# Altium PCB CAN-to-CAN2.PcbDoc
Units mm, origin at the board's own origin, x right, y up, seen from the top; angles counter-clockwise.
Board outline 134.75 x 110.49 mm, 4 copper layers (Top Layer 1, GND, +5V, Bottom Layer 4), stack 0.603 mm thick; 112 components, 87 nets, 365 pads, 18 vias.
Unrouted connection lines stored in the file: 211.
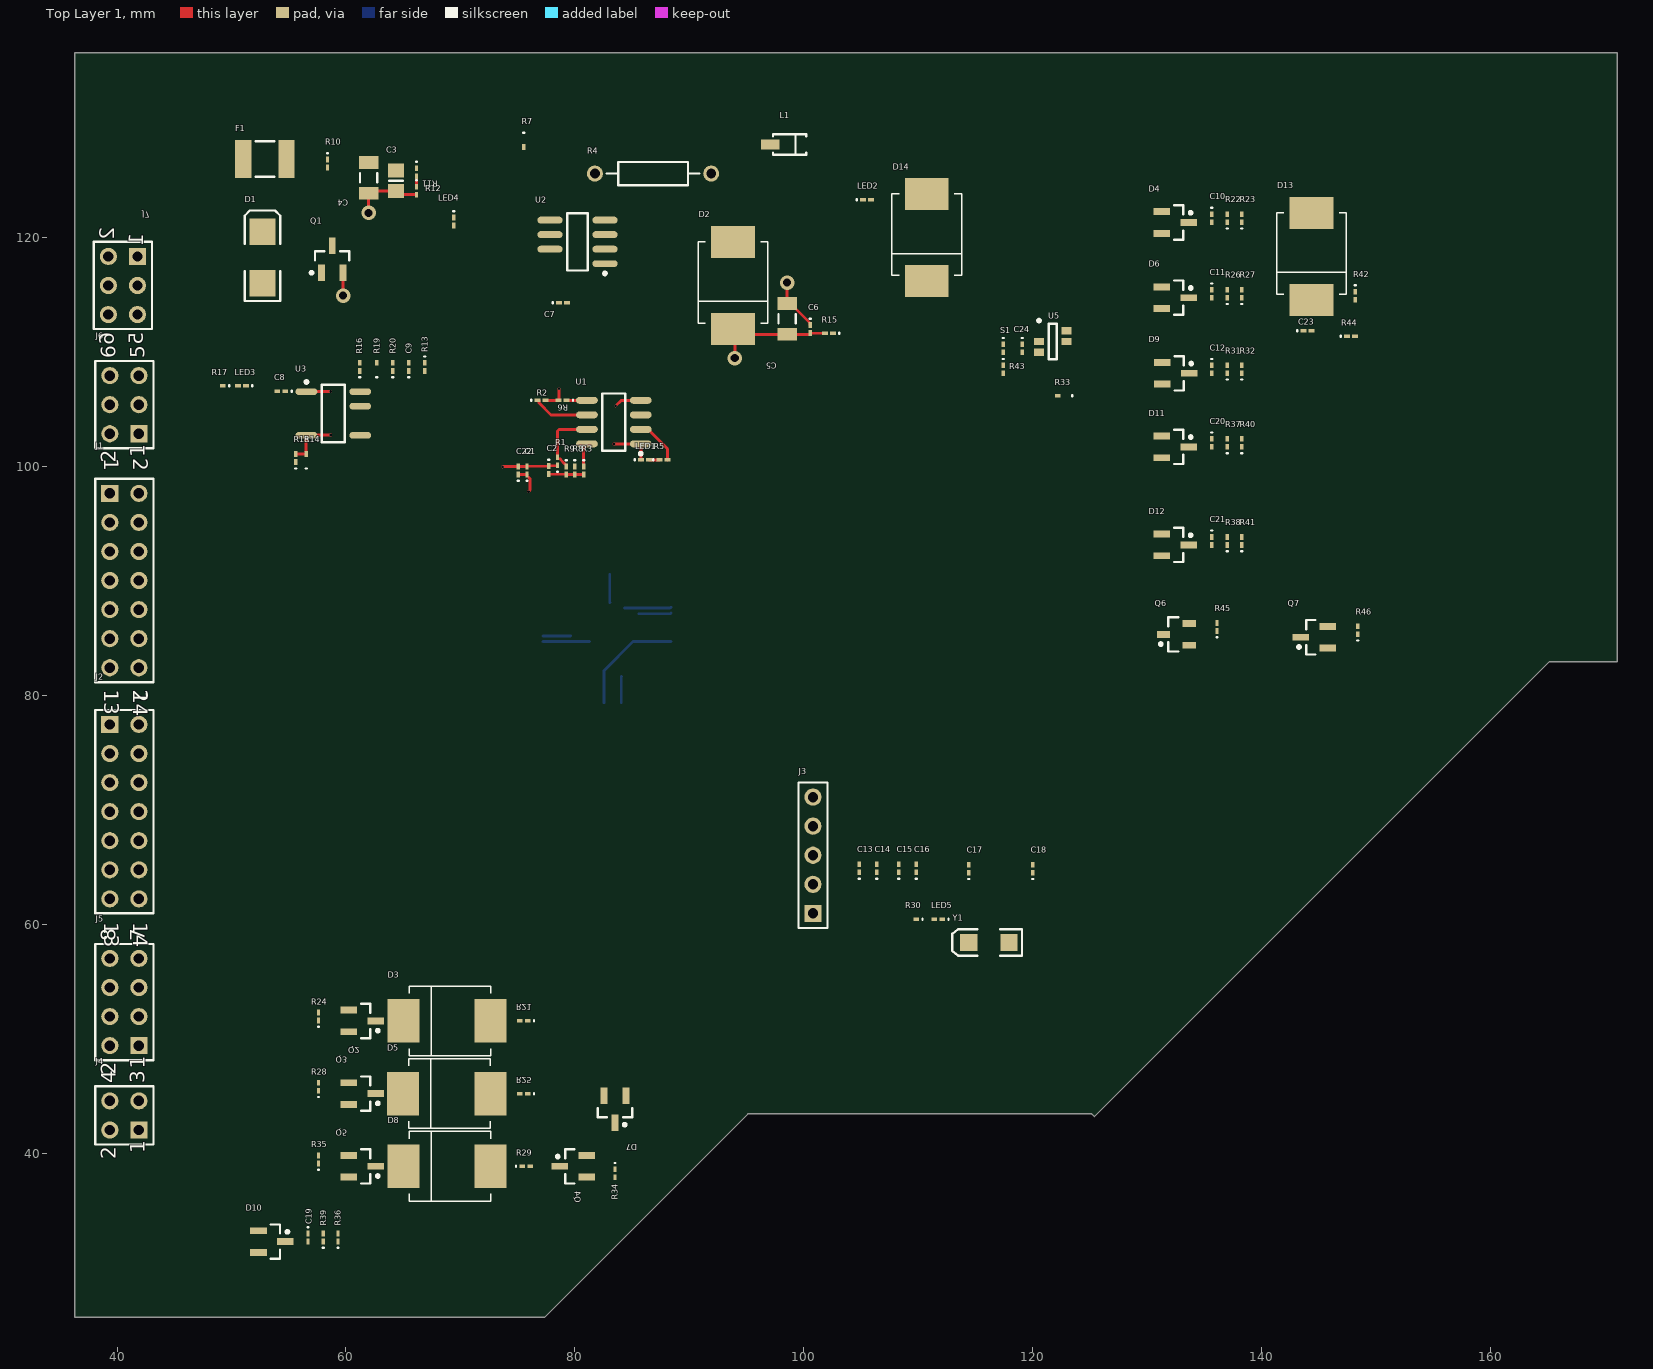
[diagram p0: Top Layer 1 view]
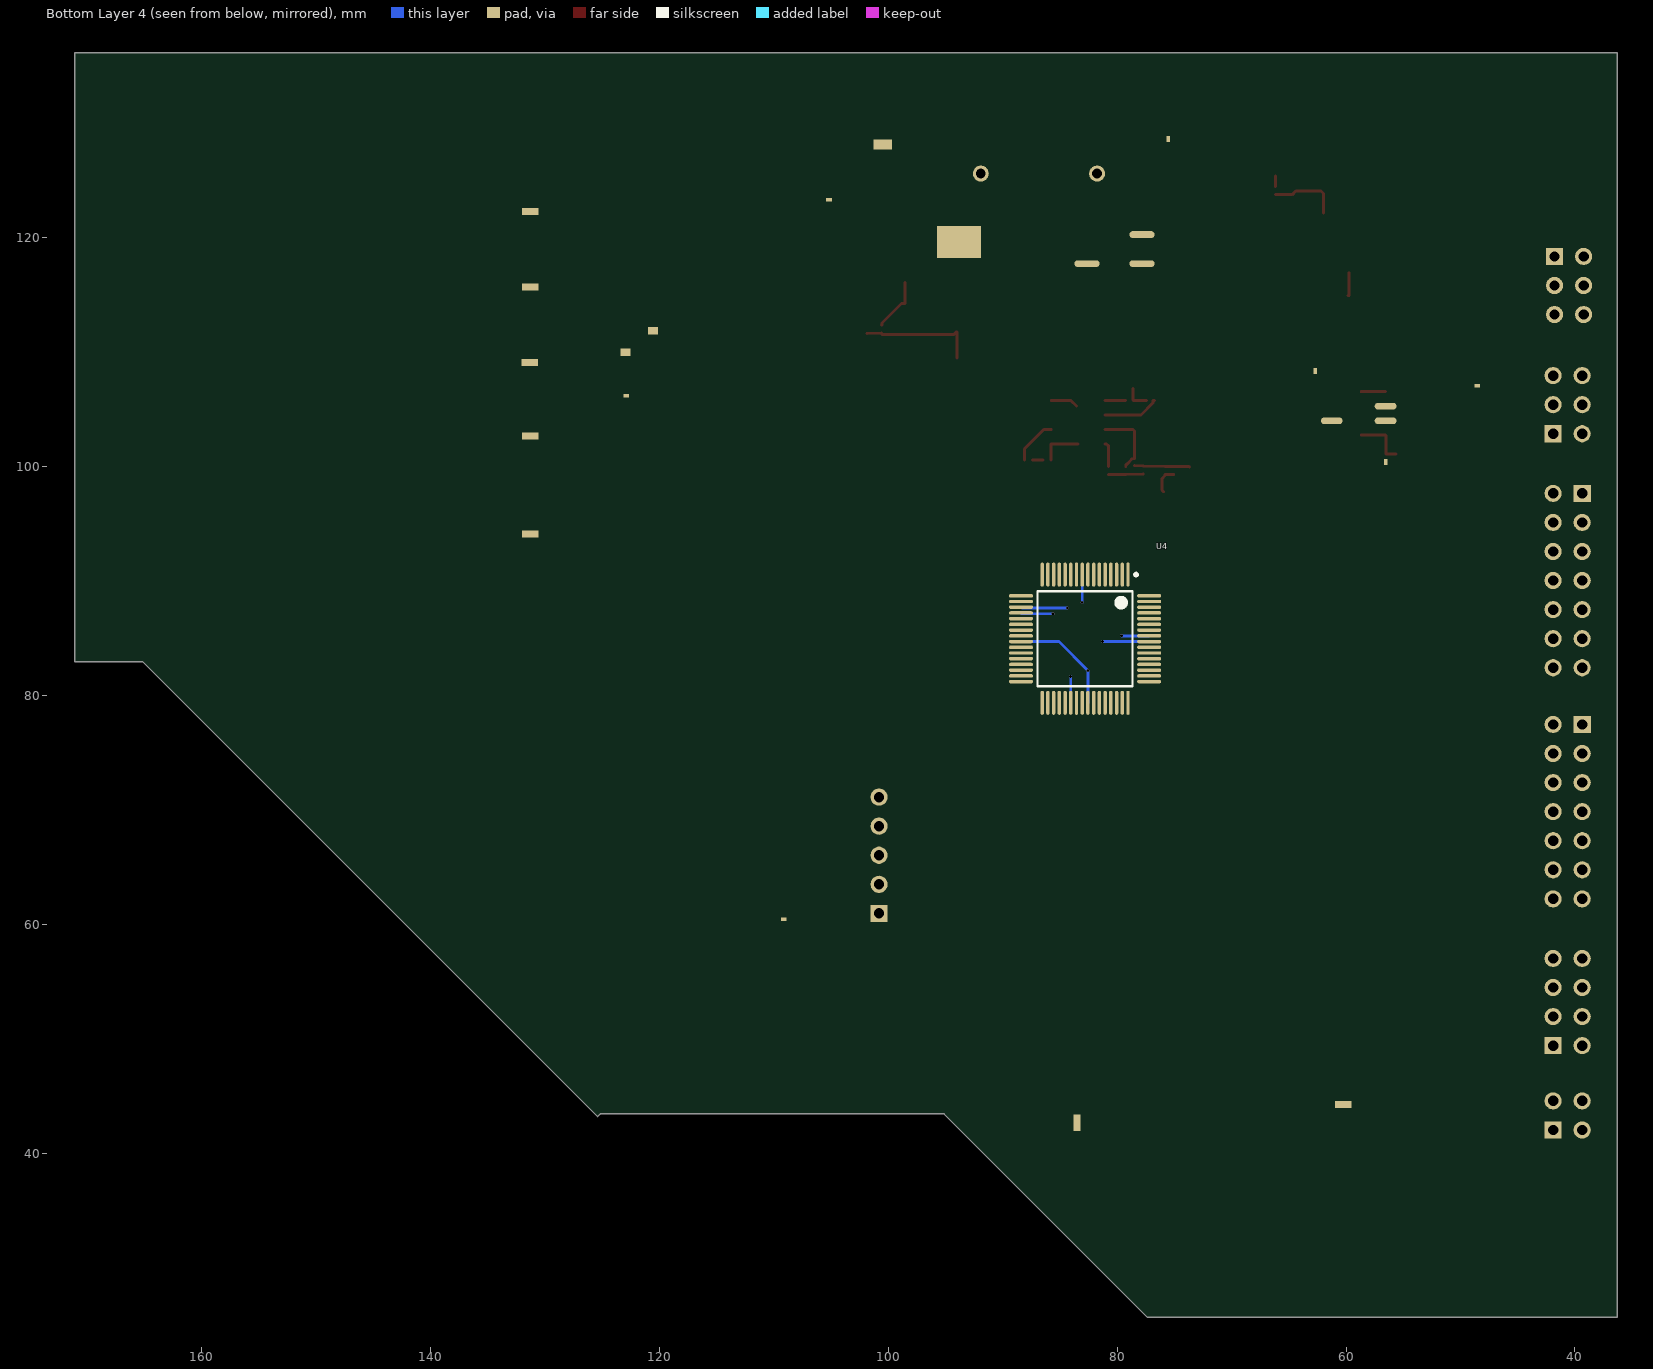
[diagram p1: Bottom Layer 4 view, seen from below]
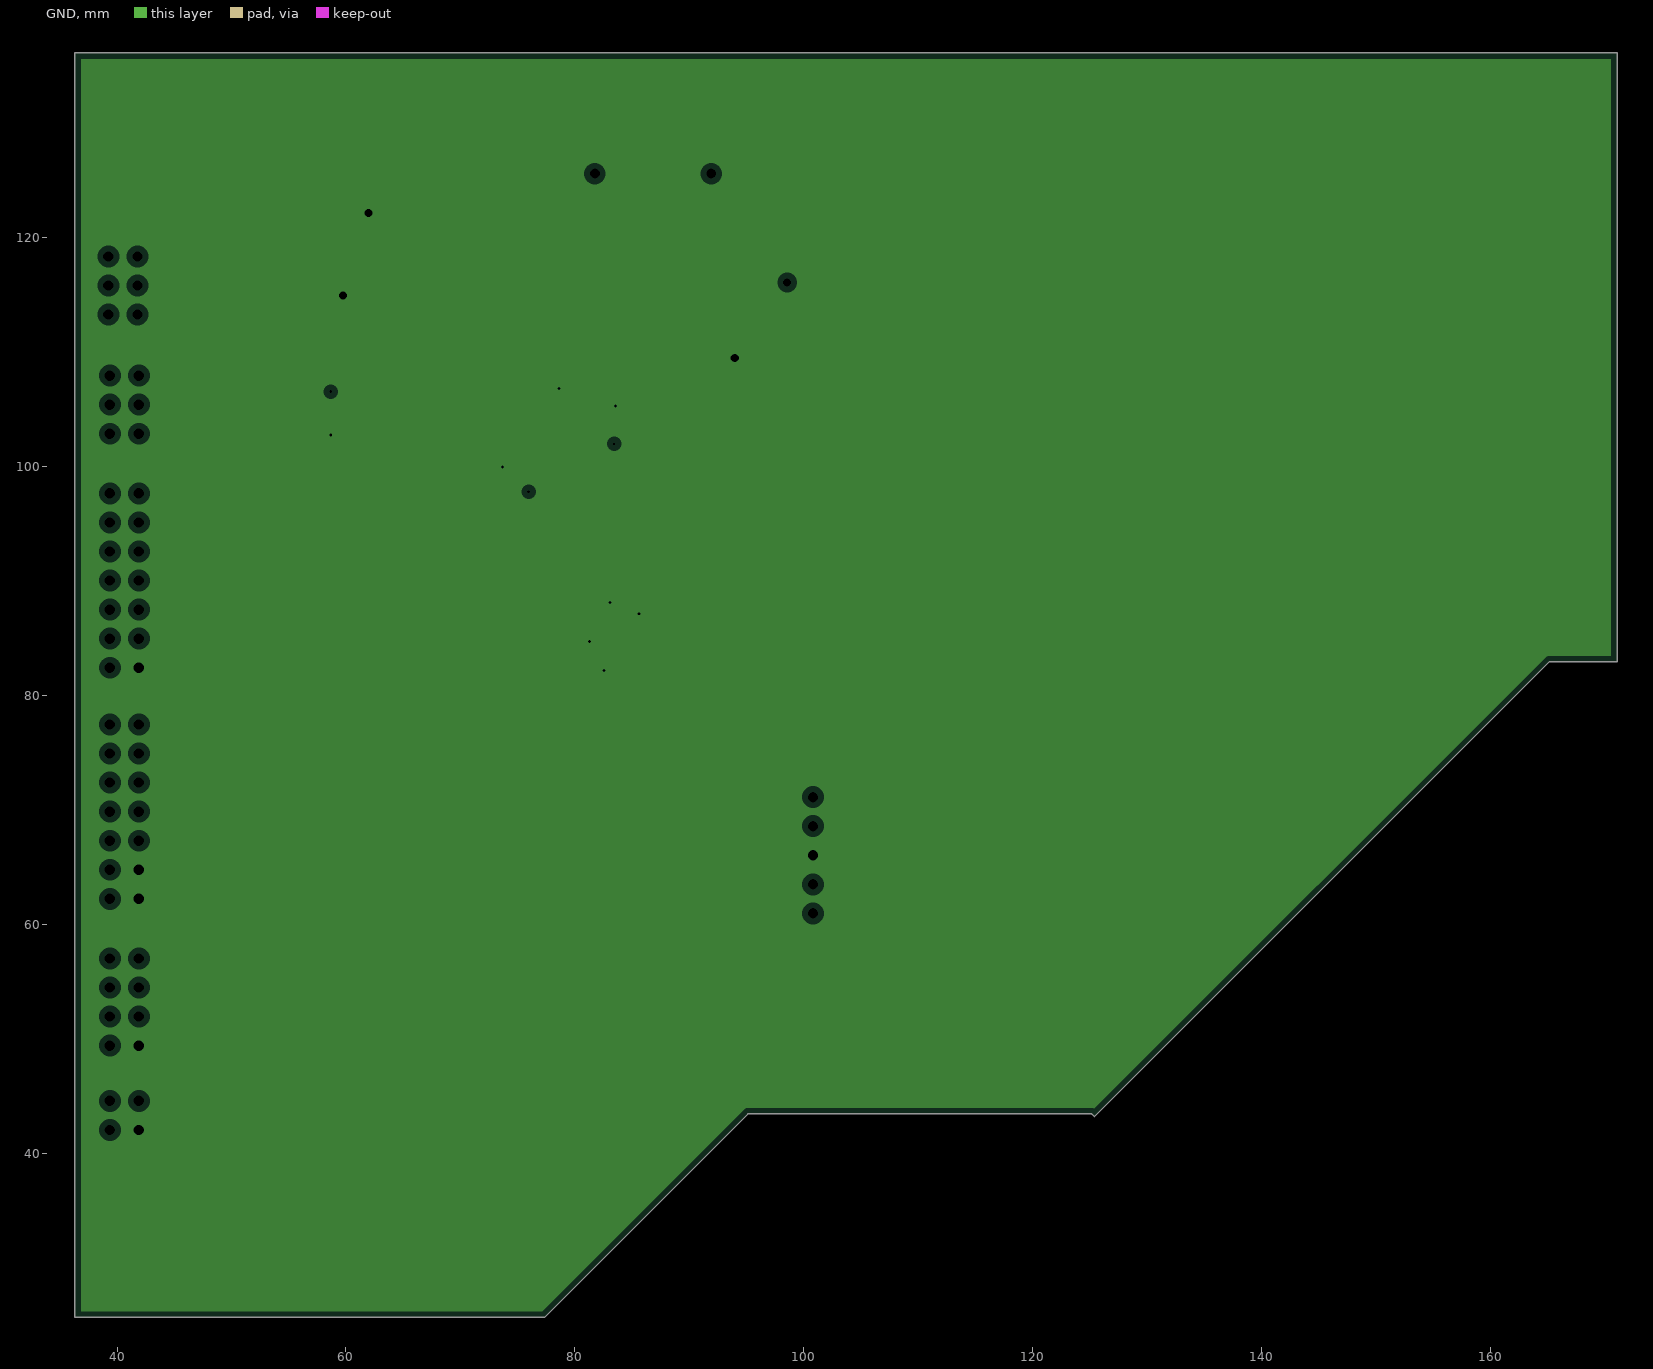
[diagram p2: GND, clearances drawn from the general rule]
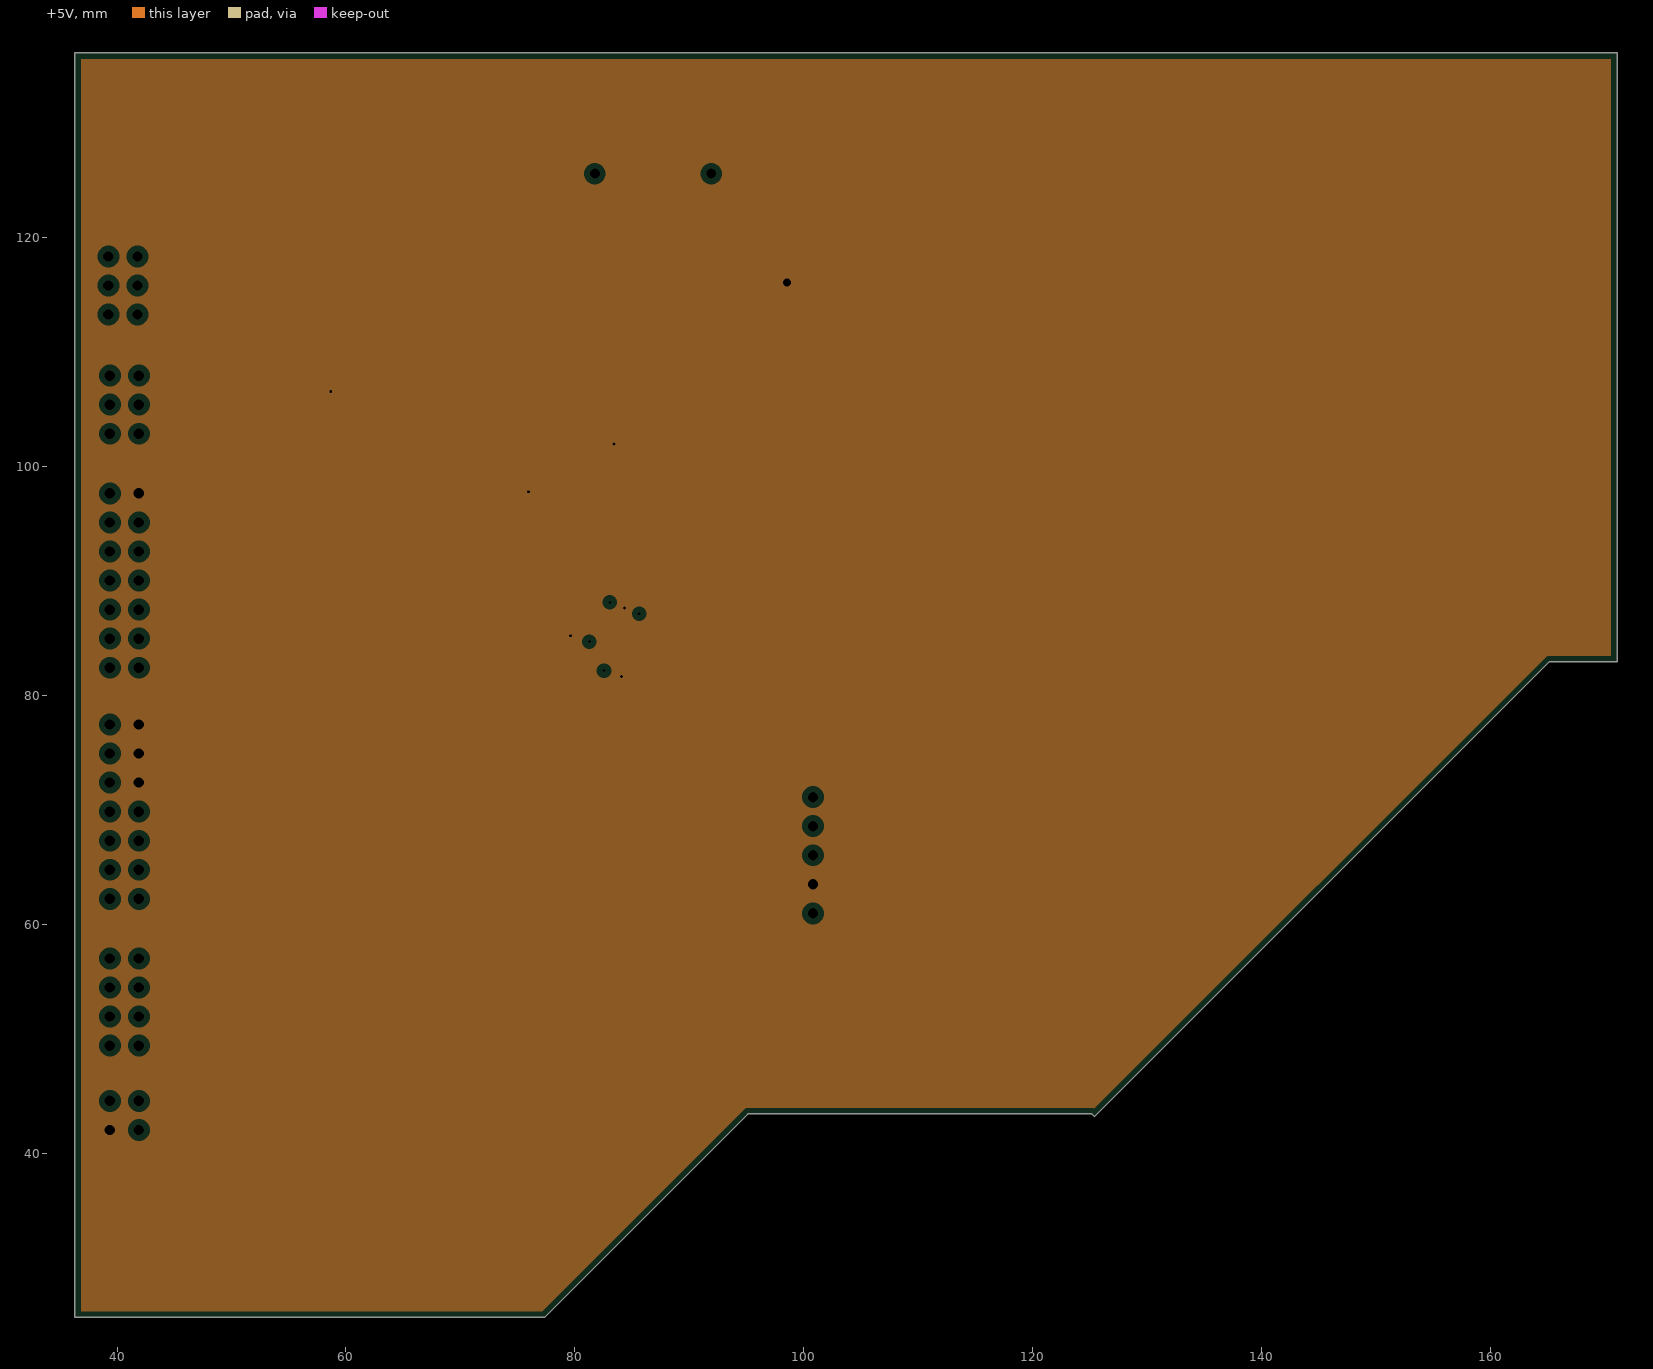
[diagram p3: +5V, clearances drawn from the general rule]

## Layer stack, top to bottom
Top Solder: solder mask 0.0102, Solder Resist, Dk 3.5
Top Layer 1: signal copper 0.0356
Dielectric 2: prepreg 0.0711, PP-006, Dk 4.1
GND: plane copper 0.035, net GND
Dielectric 1: dielectric 0.32, FR-4, Dk 4.8
+5V: plane copper 0.035, net +5V
Dielectric 3: prepreg 0.0711, PP-006, Dk 4.1
Bottom Layer 4: signal copper 0.0356
Bottom Solder: solder mask 0.0102, Solder Resist, Dk 3.5

## Board outline
36.322,136.144 171.069,136.144 171.069,82.931 165.134,82.931 125.403,43.2 125.169,43.434 95.123,43.434 77.343,25.654 36.322,25.654

## Design rules (kind name [scope] priority, off if disabled: settings)
Clearance [All] p1: gap=0.152 ignorepadtopadclearanceinfootprint=FALSE except(0: Arc-Hole Track-Hole SMDPad-Hole THPad-Hole Via-Hole Fill-Hole Poly-Hole Region-Hole Text-Hole)
PlaneClearance [All] p1: clearance=0.508
PlaneConnect [All] p1: planeconnectstyle=Relief reliefexpansion=0.508 reliefentries=4 reliefconductorwidth=0.254 reliefairgap=0.254
PolygonConnect [All] p1: connectstyle=Relief reliefconductorwidth=0.254 reliefentries=4 polygonreliefangle="90 Angle" airgapwidth=0.254
RoutingVias [All] p1: holewidth=0.711 width=1.27 viastyle="Through Hole" minholewidth=0.711 minwidth=1.27 maxholewidth=0.711 maxwidth=1.27
ShortCircuit [All] p1: allowed=TRUE
SolderMaskExpansion [All] p1: expansion=0.102
Width [All] p1: maxlimit=0.254 minlimit=0.203 preferedwidth=0.254 minimp=50.000000 maximp=50.000000 favimp=50.000000
27 further rules are at their usual default settings.

## Components (designator, comment, footprint, x,y, rotation, side; value= is the part's Value field where it differs from the comment)
C1 "100n" 0603#1 75.819,99.664 r90 top
C2 "4n7" 0603#1 77.724,99.695 r270 top value=100n
C3 "100n" 6-0805_N 64.389,124.979 r270 top
C4 "Cap Semi" C1206 61.976,125.222 r270 top value=100pF
C5 "Cap Semi" C1206 98.552,112.903 r270 top value=100pF
C6 "100n" 0603#1 100.584,112.014 r270 top
C7 "100p" 0603#1 78.963,114.3 r0 top value=100pF
C8 "100n" 0603#1 54.356,106.596 r180 top
C9 "4n7" 0603#1 65.501,108.712 r90 top value=100n
C10 "100n" 0603#1 135.65,121.705 r270 top
C11 "100n" 0603#1 135.65,115.106 r270 top
C12 "100n" 0603#1 135.65,108.502 r270 top
C13 "100n" 0603#1 104.871,64.897 r90 top
C14 "100n" 0603#1 106.395,64.897 r90 top
C15 "100n" 0603#1 108.3,64.897 r90 top
C16 "100n" 0603#1 109.824,64.897 r90 top
C17 "27p" 0603#1 114.427,64.866 r90 top value=100n
C18 "27p" 0603#1 120.015,64.866 r90 top value=100n
C19 "100n" 0603#1 56.683,32.632 r270 top
C20 "100n" 0603#1 135.65,102.077 r270 top
C21 "100n" 0603#1 135.65,93.507 r270 top
C22 "100n" 0603#1 75.057,99.664 r90 top
C23 "100n" 0603#1 144.018,111.887 r0 top
C24 "10n" 0603#1 119.095,110.332 r270 top value=100pF
D1 "P6SMB15A" SMB 52.705,118.273 r90 top
D2 "LL5817" DIODE_SMC#1 93.822,115.824 r90 top
D3 "LL4148" DIODE_SMC#2 68.834,51.562 r0 top
D4 "BAT54S" SOT23_M#1 132.462,121.324 r0 top
D5 "LL4148" DIODE_SMC#2 68.803,45.212 r0 top
D6 "BAT54S" SOT23_M#1 132.462,114.756 r0 top
D7 "BAT54S" SOT23_M#2 83.51,43.847 r270 top
D8 "LL4148" DIODE_SMC#2 68.834,38.862 r0 top
D9 "BAT54S" SOT23_M#1 132.504,108.152 r0 top
D10 "BAT54S" SOT23_M#3 53.538,32.282 r0 top
D11 "BAT54S" SOT23_M#1 132.462,101.727 r0 top
D12 "BAT54S" SOT23_M#1 132.462,93.157 r0 top
D13 "LL4148" DIODE_SMC#2 144.368,118.364 r90 top
D14 "LL4448" DIODE_SMC#2 110.744,120.015 r90 top
F1 "Fuse 1" 1812 52.928,126.873 r0 top
J1 "Header 7X2" HDR2X7 39.37,97.663 r270 top
J2 "Header 7X2" HDR2X7 39.37,77.47 r270 top
J3 "ZL201" HDR1X5 100.807,60.96 r90 top
J4 "MX-43045-0400" HDR2X2 41.91,42.037 r90 top
J5 "MX-43045-0800" HDR2X4 41.91,49.403 r90 top
J6 "MX-43045-0600" HDR2X3#1 41.91,102.87 r90 top
J7 "MX-43045-0600" HDR2X3#2 41.783,118.364 r270 top
L1 "Inductor Isolated" 425 98.775,128.143 r180 top value=10mH
LED1 "HCL-1904AYL" 0603#1 86.137,100.584 r0 top
LED2 "HCL-1903BG4" 0603#2 105.537,123.317 r0 top
LED3 "HCL-1906BR1" 0603#1 50.927,107.061 r180 top
LED4 "HCL-1904AYL" 0603#1 66.167,124.11 r270 top
LED5 "HCL-1906BR1" 0603#1 111.76,60.452 r180 top
Q1 "BSS138" SOT-23_M 58.801,118.11 r90 top
Q2 "BSS123" SOT23_M#4 61.437,51.562 r0 top
Q3 "BSS123" SOT23_M#5 61.437,45.212 r0 top
Q4 "BSS123" SOT23_M#4 79.852,38.862 r180 top
Q5 "BSS123" SOT23_M#4 61.437,38.862 r0 top
Q6 "BSS123" SOT23_N 132.557,85.344 r180 top
Q7 "BSS123" SOT23_M#3 144.622,85.09 r180 top
R1 "CAN0001" 0603#1 78.486,100.457 r90 top
R2 "CAN0001" 0603#1 77.089,105.791 r0 top
R3 "nc" 0603#1 80.772,99.664 r270 top value=1K
R4 "1R" AXIAL-0.4 86.837,125.603 r180 top value=1K
R5 "4k7" 0603#1 87.757,100.584 r0 top value=1K
R6 "1k" 0603#1 78.932,105.791 r180 top value=1K
R7 "3k6 1%" 0603#3 75.534,128.27 r270 top value=1K
R8 "68" 0603#1 79.979,99.664 r270 top value=1K
R9 "68" 0603#1 79.248,99.664 r270 top value=1K
R10 "1M" 0603#1 58.389,126.492 r270 top value=1K
R11 "1k2 1%" 0603#1 69.438,121.412 r270 top value=1K
R12 "4k7" 0603#1 66.167,125.73 r270 top value=1K
R13 "CAN0001" 0603#1 66.898,108.712 r270 top
R14 "CAN0001" 0603#3 56.515,100.742 r90 top
R15 "1k8" 0603#1 102.204,111.633 r180 top value=1K
R16 "nc" 0603#1 61.22,108.712 r90 top value=1K
R17 "4k7" 0603#4 48.895,107.061 r180 top value=1K
R18 "1k" 0603#1 55.626,100.742 r90 top value=1K
R19 "68" 0603#3 62.707,108.712 r90 top value=1K
R20 "68" 0603#1 64.104,108.712 r90 top value=1K
R21 "10k" 0603#1 75.534,51.562 r180 top value=1K
R22 "10k" 0603#1 137.002,121.705 r90 top value=1K
R23 "1k" 0603#1 138.272,121.705 r90 top value=1K
R24 "4k7" 0603#1 57.602,51.954 r90 top value=1K
R25 "10k" 0603#1 75.534,45.212 r180 top value=1K
R26 "10k" 0603#1 137.002,115.106 r90 top value=1K
R27 "1k" 0603#1 138.272,115.106 r90 top value=1K
R28 "4k7" 0603#1 57.602,45.809 r90 top value=1K
R29 "10k" 0603#1 75.759,38.862 r0 top value=1K
R30 "1k8" 0603#4 109.474,60.452 r180 top value=1K
R31 "10k" 0603#1 137.002,108.502 r90 top value=1K
R32 "1k" 0603#1 138.272,108.502 r90 top value=1K
R33 "nc" 0603#3 122.555,106.172 r180 top value=1K
R34 "4k7" 0603#1 83.51,38.258 r270 top value=1K
R35 "4k7" 0603#1 57.602,39.462 r90 top value=1K
R36 "10k" 0603#1 58.035,32.632 r90 top value=1K
R37 "10k" 0603#1 137.002,102.077 r90 top value=1K
R38 "10k" 0603#1 137.002,93.507 r90 top value=1K
R39 "470" 0603#1 59.305,32.632 r90 top value=1K
R40 "1k" 0603#1 138.272,102.077 r90 top value=1K
R41 "1k" 0603#1 138.272,93.507 r90 top value=1K
R42 "4k7" 0603#1 148.178,114.935 r270 top value=1K
R43 "10k" 0603#1 117.44,108.502 r270 top value=1K
R44 "4k7" 0603#1 147.828,111.379 r0 top value=1K
R45 "4k7" 0603#1 136.113,85.979 r90 top value=1K
R46 "4k7" 0603#1 148.405,85.698 r90 top value=1K
S1 "DTSM32NB" 0603#1 117.444,110.332 r270 top
U1 "MCP2551-I/SN" SO8_L#1 83.408,103.886 r180 top
U2 "MC33063AD" SO8_N 80.233,119.634 r180 top
U3 "MCP2551-I/SN" SO8_L#2 58.897,104.639 r0 top
U4 "PIC30F5011" ST-64-2_M 82.804,84.963 r270 bottom
U5 "MCP1320-46LT" SOT23-6_L 121.762,110.932 r0 top
Y1 "10MHz" 3.2X1.6X1.1 116.177,58.42 r180 top

## Footprints (in the part's own frame and the unit in brackets; to place one, negate y for a bottom-side part, rotate by r counter-clockwise, add the part's x,y. Pads: shape width x height; smd on the part's side, far side on the other; paste and mask are expansions set on the pad)
3.2X1.6X1.1 [mm] "SMT LED; 2 Flat Leads"
  rect 1.5x1.5 smd: 1(-1.75,0) 2(1.75,0)
  silkscreen extent -2.9,-1.15 3.2,1.15
6-0805_N [mm] "Chip Resistor, Body 2.0x1.2mm, IPC Medium Density"
  rect 1.2x1.4 smd: 1(-0.9,0) 2(0.9,0)
  silkscreen extent 0,-0.6 0,0.6, body extent -1.07,-0.7 1.07,0.7, height 0.7
425 [mm] "SOD-123; 2 Leads; Body 2.7 x 1.6 mm, (LxW)"
  rect 1.6x0.85 smd far side: 1(-1.7,0)
  rect 1.6x0.85 smd: 2(1.7,0)
  silkscreen extent -1.45,-0.9 1.45,0.9
0603#1 [mm] "Chip Inductor, Body 0.6x0.3mm, IPC High Density"
  rect 0.5x0.3 smd: 1(-0.35,0) 2(0.35,0)
  silkscreen extent -0.9,-0.05 -0.9,0.05, body extent -0.33,-0.18 0.33,0.18, height 0.55
0603#2 [mm] "Chip Inductor, Body 0.6x0.3mm, IPC High Density"
  rect 0.5x0.3 all layers, no hole: 1(-0.35,0)
  rect 0.5x0.3 smd: 2(0.35,0)
  silkscreen extent -0.9,-0.05 -0.9,0.05, body extent -0.33,-0.18 0.33,0.18, height 0.55
0603#3 [mm] "Chip Inductor, Body 0.6x0.3mm, IPC High Density"
  rect 0.5x0.3 smd far side: 1(-0.35,0)
  rect 0.5x0.3 smd: 2(0.35,0)
  silkscreen extent -0.9,-0.05 -0.9,0.05, body extent -0.33,-0.18 0.33,0.18, height 0.55
0603#4 [mm] "Chip Inductor, Body 0.6x0.3mm, IPC High Density"
  rect 0.5x0.3 smd: 1(-0.35,0)
  rect 0.5x0.3 smd far side: 2(0.35,0)
  silkscreen extent -0.9,-0.05 -0.9,0.05, body extent -0.33,-0.18 0.33,0.18, height 0.55
1812 [mm] "Chip Capacitor, Body 4.5x3.2mm, IPC High Density"
  rect 1.4x3.3 smd: 1(-1.9,0) 2(1.9,0)
  silkscreen extent -0.8,-1.55 0.8,1.55, body extent -2.4,-1.7 2.4,1.7, height 1.4
AXIAL-0.4 [mm] "Axial Device, Thru-Hole; 2 Leads; 0.4 in Pin Spacing"
  round 1.4 hole 0.85: 1(-5.08,0) 2(5.08,0)
  silkscreen extent -4.06,-1.02 4.06,1.02
C1206 [mm] "Chip Capacitor, Body 3.2x1.6mm, IPC High Density"
  rect 1.1x1.7 smd: 1(-1.35,0) 2(1.35,0)
  silkscreen extent -0.4,-0.75 0.4,0.75, body extent -1.7,-0.9 1.7,0.9, height 1.3
DIODE_SMC#1 [mil] "Diode; 2 Leads"
  rect 110x150 smd: 1(-150,0)
  rect 110x150 all layers, no hole: 2(150,0)
  silkscreen extent -130,-120 150,120
DIODE_SMC#2 [mil] "Diode; 2 Leads"
  rect 110x150 smd: 1(-150,0) 2(150,0)
  silkscreen extent -130,-120 150,120
HDR1X5 [mm] "Connector; Header; 5 Position"
  rect 1.5x1.5 hole 0.9: 1(0,0)
  round 1.5 hole 0.9: 2(2.54,0) 3(5.08,0) 4(7.62,0) 5(10.16,0)
  silkscreen extent -1.27,-1.27 11.43,1.27
HDR2X2 [mm] "Connector; Header; 2x2 Position"
  rect 1.5x1.5 hole 0.9: 1(0,0)
  round 1.5 hole 0.9: 2(0,2.54) 3(2.54,0) 4(2.54,2.54)
  silkscreen extent -1.27,-1.27 3.81,3.81
HDR2X3#1 [mm] "Connector; Header; 3x2 Position"
  rect 1.5x1.5 hole 0.9: 1(0,0)
  round 1.5 hole 0.9: 2(0,2.54) 3(2.54,0) 4(2.54,2.54) 5(5.08,0) 6(5.08,2.54)
  silkscreen extent -1.27,-1.27 6.35,3.81
HDR2X3#2 [mm] "Connector; Header; 3x2 Position"
  rect 1.5x1.5 hole 0.9: 1(0,0)
  round 1.5 hole 0.9: 2(0,-2.54) 3(2.54,0) 4(2.54,-2.54) 5(5.08,0) 6(5.08,-2.54)
  silkscreen extent -1.27,-3.81 6.35,1.27
HDR2X4 [mm] "Connector; Header; 4x2 Position"
  rect 1.5x1.5 hole 0.9: 1(0,0)
  round 1.5 hole 0.9: 2(0,2.54) 3(2.54,0) 4(2.54,2.54) 5(5.08,0) 6(5.08,2.54) 7(7.62,0) 8(7.62,2.54)
  silkscreen extent -1.27,-1.27 8.89,3.81
HDR2X7 [mm] "Connector; Header; 7x2 Position"
  rect 1.5x1.5 hole 0.9: 1(0,0)
  round 1.5 hole 0.9: 2(0,2.54) 3(2.54,0) 4(2.54,2.54) 5(5.08,0) 6(5.08,2.54) 7(7.62,0) 8(7.62,2.54) 9(10.16,0) 10(10.16,2.54) 11(12.7,0) 12(12.7,2.54) 13(15.24,0) 14(15.24,2.54)
  silkscreen extent -1.27,-1.27 16.51,3.81
SMB [mm] "DO-214-AA/SMB; 2 C-Bend Leads; Body 5.3 x 3.6 mm, inc. leads (LxW)"
  rect 2.3x2.3 smd: 1(-2.25,0) 2(2.25,0)
  silkscreen extent -3.8,-1.55 4.1,1.55
SO8_L#1 [mm] "SOIC, 8-Leads, Body 4.9x3.9mm, Pitch 1.27mm, IPC High Density"
  oval 1.9x0.6 smd: 1(-2.35,1.905) 2(-2.35,0.635) 3(-2.35,-0.635) 4(-2.35,-1.905) 5(2.35,-1.905) 6(2.35,-0.635) 7(2.35,0.635) 8(2.35,1.905)
  silkscreen extent -2.48,-2.5 1,2.88, body extent -2,-2.5 2,2.5, height 1.75
SO8_L#2 [mm] "SOIC, 8-Leads, Body 4.9x3.9mm, Pitch 1.27mm, IPC High Density"
  oval 1.9x0.6 smd: 1(-2.35,1.905) 4(-2.35,-1.905) 5(2.35,-1.905) 7(2.35,0.635) 8(2.35,1.905)
  oval 1.9x0.6 smd far side: 2(-2.35,0.635) 3(-2.35,-0.635) 6(2.35,-0.635)
  silkscreen extent -2.47,-2.5 1,2.88, body extent -2,-2.5 2,2.5, height 1.75
SO8_N [mm] "SOIC, 8-Leads, Body 4.9x3.9mm, Pitch 1.27mm, IPC Medium Density"
  oval 2.2x0.6 all layers, no hole: 1(-2.4,1.905) 6(2.4,-0.635)
  oval 2.2x0.6 smd: 2(-2.4,0.635) 3(-2.4,-0.635) 4(-2.4,-1.905) 5(2.4,-1.905) 7(2.4,0.635)
  oval 2.2x0.6 smd far side: 8(2.4,1.905)
  silkscreen extent -2.53,-2.5 0.9,2.88, body extent -2,-2.5 2,2.5, height 1.75
SOT23-6_L [mm] "SOT23, 6-Leads, Body 2.9x1.6mm, Pitch 0.95mm, Lead Span 2.7mm, IPC High Density"
  rect 0.9x0.65 smd far side: 1(-1.2,0.95) 4(1.2,-0.95)
  rect 0.9x0.65 smd: 2(-1.2,0) 3(-1.2,-0.95) 5(1.2,0) 6(1.2,0.95)
  silkscreen extent -1.32,-1.55 0.35,1.95, body extent -0.9,-1.55 0.9,1.55, height 1.45
SOT23_M#1 [mm] "SOT23, 3-Leads, Body 2.9x1.3mm, Pitch 0.95mm, Lead Span 2.3mm - Reverse Pinning, IPC Low Density"
  rect 1.45x0.6 smd: 1(1.175,0) 2(-1.175,-0.95)
  rect 1.45x0.6 all layers, no hole: 3(-1.175,0.95)
  silkscreen extent -0.1,-1.5 1.48,1.5, body extent -0.7,-1.5 0.7,1.5, height 1.1
SOT23_M#2 [mm] "SOT23, 3-Leads, Body 2.9x1.3mm, Pitch 0.95mm, Lead Span 2.3mm - Reverse Pinning, IPC Low Density"
  rect 1.45x0.6 all layers, no hole: 1(1.175,0)
  rect 1.45x0.6 smd: 2(-1.175,-0.95) 3(-1.175,0.95)
  silkscreen extent -0.1,-1.5 1.47,1.5, body extent -0.7,-1.5 0.7,1.5, height 1.1
SOT23_M#3 [mm] "SOT23, 3-Leads, Body 2.9x1.3mm, Pitch 0.95mm, Lead Span 2.3mm - Reverse Pinning, IPC Low Density"
  rect 1.45x0.6 smd: 1(1.175,0) 2(-1.175,-0.95) 3(-1.175,0.95)
  silkscreen extent -0.1,-1.5 1.48,1.5, body extent -0.7,-1.5 0.7,1.5, height 1.1
SOT23_M#4 [mm] "SOT23, 3-Leads, Body 2.9x1.3mm, Pitch 0.95mm, Lead Span 2.3mm - Reverse Pinning, IPC Low Density"
  rect 1.45x0.6 smd: 1(1.175,0) 2(-1.175,0.95) 3(-1.175,-0.95)
  silkscreen extent -0.1,-1.5 1.48,1.5, body extent -0.7,-1.5 0.7,1.5, height 1.1
SOT23_M#5 [mm] "SOT23, 3-Leads, Body 2.9x1.3mm, Pitch 0.95mm, Lead Span 2.3mm - Reverse Pinning, IPC Low Density"
  rect 1.45x0.6 smd: 1(1.175,0) 2(-1.175,0.95)
  rect 1.45x0.6 all layers, no hole: 3(-1.175,-0.95)
  silkscreen extent -0.1,-1.5 1.48,1.5, body extent -0.7,-1.5 0.7,1.5, height 1.1
SOT23_N [mm] "SOT23, 3-Leads, Body 2.9x1.3mm, Pitch 0.95mm, Lead Span 2.3mm - Reverse Pinning, IPC Medium Density"
  rect 1.15x0.6 smd: 1(1.125,0) 2(-1.125,-0.95) 3(-1.125,0.95)
  silkscreen extent -0.2,-1.5 1.47,1.5, body extent -0.7,-1.5 0.7,1.5, height 1.1
SOT-23_M [mm] "SOT23, 3-Leads, Body 2.9x1.3mm, Pitch 0.95mm, Lead Span 2.5mm, IPC Low Density"
  rect 1.45x0.6 smd: 1(-1.175,0.95) 2(-1.175,-0.95) 3(1.175,0)
  silkscreen extent -1.3,-1.5 0.7,1.92, body extent -0.7,-1.5 0.7,1.5, height 1.1
ST-64-2_M [mm] "Thin QFP, 64-Leads, Body 10x10mm, Pitch 0.5mm, IPC Low Density"
  oval 2.1x0.3 smd: 1(-5.6,3.75) 2(-5.6,3.25) 3(-5.6,2.75) 4(-5.6,2.25) 5(-5.6,1.75) 6(-5.6,1.25) 7(-5.6,0.75) 8(-5.6,0.25) 9(-5.6,-0.25) 10(-5.6,-0.75) 11(-5.6,-1.25) 12(-5.6,-1.75) 13(-5.6,-2.25) 14(-5.6,-2.75) 15(-5.6,-3.25) 16(-5.6,-3.75) 33(5.6,-3.75) 34(5.6,-3.25) 35(5.6,-2.75) 36(5.6,-2.25) 37(5.6,-1.75) 38(5.6,-1.25) 39(5.6,-0.75) 40(5.6,-0.25) 41(5.6,0.25) 42(5.6,0.75) 43(5.6,1.25) 44(5.6,1.75) 45(5.6,2.25) 46(5.6,2.75) 47(5.6,3.25) 48(5.6,3.75)
  oval 0.3x2.1 smd: 17(-3.75,-5.6) 18(-3.25,-5.6) 19(-2.75,-5.6) 20(-2.25,-5.6) 21(-1.75,-5.6) 22(-1.25,-5.6) 23(-0.75,-5.6) 24(-0.25,-5.6) 25(0.25,-5.6) 26(0.75,-5.6) 27(1.25,-5.6) 28(1.75,-5.6) 29(2.25,-5.6) 30(2.75,-5.6) 31(3.25,-5.6) 32(3.75,-5.6) 49(3.75,5.6) 50(3.25,5.6) 51(2.75,5.6) 52(2.25,5.6) 53(1.75,5.6) 54(1.25,5.6) 55(0.75,5.6) 56(0.25,5.6) 57(-0.25,5.6) 58(-0.75,5.6) 59(-1.25,5.6) 60(-1.75,5.6) 61(-2.25,5.6) 62(-2.75,5.6) 63(-3.25,5.6) 64(-3.75,5.6)
  silkscreen extent -5.72,-4.15 4.15,4.57, body extent -5,-5 5,5, height 1.6

## Part data
C1 C2 C3 C6 C7 C8 C9 C10 C11 C12 C13 C14 C15 C16 C17 C18 C19 C20 C21 C22 C23 C24: library part Cap, "Capacitor", LatestRevisionDate=17-Jul-2002, LatestRevisionNote="Re-released for DXP Platform.", PackageReference=RAD-0.3, Published=8-Jun-2000, Publisher="Altium Limited"
C4 C5: "Capacitor (Semiconductor SIM Model)", LatestRevisionDate=29-May-2009, LatestRevisionNote="IPC-7351 Footprint Added.", PackageDescription="Chip Capacitor", PackageReference=C1206, Published=8-Jun-2000, Publisher="Altium Limited"
D1: library part "D Zener", "Zener Diode", LatestRevisionDate=17-Jul-2002, LatestRevisionNote="Re-released for DXP Platform.", PackageReference=DIODE-0.7, Published=8-Jun-2000, Publisher="Altium Limited"
D2 D3 D5 D8 D13: library part 1N4148, "High Conductance Fast Diode", Code_JEDEC=DO-204-AH, ComponentLink1Description="Manufacturer Link", ComponentLink1URL=http://www.fairchildsemi.com/, ComponentLink2Description=Datasheet, ComponentLink2URL=http://www.fairchildsemi.com/ds/1N%2F1N4148.pdf, DatasheetDocument=1997, LatestRevisionDate=17-Jul-2002, LatestRevisionNote="Re-released for DXP Platform.", PackageReference=DO-35, Published=8-Jun-2000, Publisher="Altium Limited"
D4 D6 D7 D9 D10 D11 D12: "Schottky Barrier Double Diode", ComponentLink1Description="Manufacturer Link", ComponentLink1URL=http://www.semiconductors.philips.com/, ComponentLink2Description=Datasheet, ComponentLink2URL=http://www.semiconductors.philips.com/acrobat/datasheets/BAT54_SERIES_4.pdf, DatasheetVersion=4-Mar-2002, LatestRevisionDate=12-Dec-2006, LatestRevisionNote="IPC-7351 Footprint Added.", PackageDescription="3-Pin SOT-23 Package 0.95 mm Pitch, 2.3 mm Lead Span", PackageReference=SOT23, PackageVersion=May-1999, Published=17-Sep-2003, Publisher="Altium Limited"
D14: library part Diode, "Default Diode", PackageDocument=Sep-1996, Code_JEDEC=DO-214-AB, LatestRevisionDate=17-Jul-2002, LatestRevisionNote="Re-released for DXP Platform.", PackageReference=SMC, Published=8-Jun-2000, Publisher="Altium Limited"
F1: "Fuse", LatestRevisionDate=17-Jul-2002, LatestRevisionNote="Re-released for DXP Platform.", PackageReference=PIN-W2/E2.8, Published=8-Jun-2000, Publisher="Altium Limited"
J1 J2: "Header, 7-Pin, Dual row", LatestRevisionDate=17-Jul-2002, LatestRevisionNote="Re-released for DXP Platform.", Publisher="Altium Limited"
J3: library part CON5, "Connector"
J4: library part "Header 2X2", "Header, 2-Pin, Dual row", LatestRevisionDate=17-Jul-2002, LatestRevisionNote="Re-released for DXP Platform.", Publisher="Altium Limited"
J5: library part "Header 4X2A", "Header, 4-Pin, Dual row", LatestRevisionDate=17-Jul-2002, LatestRevisionNote="Re-released for DXP Platform.", Publisher="Altium Limited"
J6 J7: library part "Header 6", "Header, 6-Pin", LatestRevisionDate=17-Jul-2002, LatestRevisionNote="Re-released for DXP Platform.", Publisher="Altium Limited"
L1: "Isolated Inductor", LatestRevisionDate=17-Jul-2002, LatestRevisionNote="Re-released for DXP Platform.", PackageDescription="SOD-123; 2 Leads; Body 2.7 x 1.6 mm, (LxW)", PackageReference=425, PackageVersion=1988, Published=24-Mar-1999, Publisher="Altium Limited"
LED1 LED2 LED3 LED4 LED5: library part LED3, "Typical BLUE SiC LED", Published=8-Jun-2000, Publisher="Altium Limited", Revision 1="Jul-2002: Re-released for DXP Platform.", Revision 2="17-Dec-2003: PCB Footprint replaced."
Q1: "N-Channel Enhancement Mode Vertical DMOS FET", ComponentLink1Description="Manufacturer Link", ComponentLink1URL=http://www.zetex.com/, ComponentLink2Description=Datasheet, ComponentLink2URL=www.zetex.com/3.0/pdf/BSS138.pdf, DatasheetVersion=Mar-96, PackageDescription="SOT-23; 3 Leads; Body 3.1 x 2.5 mm, inc. leads (LxW max), Alternate Lead Configuration", PackageReference=SOT23, PackageVersion=1996, Published=17-Dec-2003, Publisher="Altium Limited"
Q2 Q3 Q4 Q5 Q6 Q7: "N-channel Enhancement Mode Vertical D-MOSFET", ComponentLink1Description="Manufacturer Link", ComponentLink1URL=http://www.semiconductors.philips.com/, ComponentLink2Description=Datasheet, ComponentLink2URL=http://www.semiconductors.philips.com/acrobat/datasheets/BSS123_3.pdf, DatasheetVersion=Apr-1995, LatestRevisionDate=12-Dec-2006, LatestRevisionNote="IPC-7351 Footprint Added.", PackageDescription="3-Pin SOT-23 Package 0.95 mm Pitch, 2.3 mm Lead Span", PackageReference=SOT23, PackageVersion=May-1999, Published=17-Sep-2003, Publisher="Altium Limited"
R1 R2 R13 R14: library part "Res Varistor", "Varistor (Voltage-Sensitive Resistor)", LatestRevisionDate=04-Mar-2005, LatestRevisionNote="PCB Footprint replaced.", PackageReference=6-0805, Published=24-Mar-1999, Publisher="Altium Limited"
R3 R4 R5 R6 R7 R8 R9 R10 R11 R12 R15 R16 R17 R18 R19 R20 R21 R22 R23 R24 R25 R26 R27 R28 R29 R30 R31 R32 R33 R34 R35 R36 R37 R38 R39 R40 R41 R42 R43 R44 R45 R46: library part Res2, "Resistor", LatestRevisionDate=17-Jul-2002, LatestRevisionNote="Re-released for DXP Platform.", PackageReference=AXIAL-0.4, Published=8-Jun-2000, Publisher="Altium Limited"
S1: library part PUSHB, "Switch PushButton"
U1 U3: "High Speed CAN Transceiver, 8-Pin Plastic SOIC, Industrial Grade", Code_JEDEC=MS-012, ComponentLink1Description="Manufacturer Link", ComponentLink1URL=http://www.microchip.com, ComponentLink2Description=Datasheet, ComponentLink2URL=http://ww1.microchip.com/downloads/en/DeviceDoc/21667d.pdf, DatasheetVersion=Nov-2003, LatestRevisionDate=13-Apr-2006, LatestRevisionNote="IPC-7351 Footprint Added.", PackageDescription="8-Pin Plastic Narrow Body Small Outline Integrated Circuit 1.27 mm Pitch", PackageReference=SOIC150-8, PackageVersion=Oct-2005, Published=6-Oct-2005, Publisher="Altium Limited"
U2: "DC-to-DC Converter Control Circuit", Code_IPC=SOIC127P600-8, Code_JEDEC=MS-012-AA, ComponentLink1Description="Manufacturer Link", ComponentLink1URL=http://www.onsemi.com/site/products/taxonomy/0,4438,503,00.html, ComponentLink2Description=Datasheet, ComponentLink2URL=http://www.onsemi.com/pub/Collateral/MC34063A-D.PDF, DatasheetVersion=1988, LatestRevisionDate=13-Apr-2006, LatestRevisionNote="IPC-7351 Footprint Added.", PackageDescription="8-Pin Small Outline Integrated Circuit 1.27 mm Pitch", PackageReference=751-02, Published=17-Jul-2002, Publisher="Altium Limited"
U4: "PIC30F5011 - Up"
U5: library part MCP1320
Y1: library part XTAL, "Crystal Oscillator", LatestRevisionDate=17-Jul-2002, LatestRevisionNote="Re-released for DXP Platform.", PackageReference=R38, Published=8-Jun-2000, Publisher="Altium Limited"

## Via types
v1: diameter 0.254, hole 0.254, Top Layer 1 to GND, 4 vias
v2: diameter 0.254, hole 0.254, GND to Bottom Layer 4, 4 vias
v3: diameter 0.254, hole 0.254, Top Layer 1 to +5V, 3 vias
v4: diameter 1.27, hole 0.711, Top Layer 1 to GND, 3 vias
v5: diameter 0.254, hole 0.254, +5V to Bottom Layer 4, 3 vias
v6: diameter 1.27, hole 0.711, Top Layer 1 to +5V, 1 vias

## Nets (pads, with @x,y where several pads share a name; then routed paths per layer and width w, separated by ;. In a path a pad name is that pad's centre, name@x,y a point inside that pad or via, vN(x,y) a via of type N, cw(c..) or ccw(c..) an arc to the next point about the centre after c; other vN are vias at no path point)
+5V: C1.1 C5.1 C6.1 C8.1 C13.1 C14.1 C15.1 C16.1 C22.1 D4.2 D6.2 D7.2 D9.2 D10.2 D11.2 D12.2 D13.2 D14.2 J1.2 J2.2 J2.4 J2.6 J3.2 J4.2 L1.2 LED1.1 LED2.1 LED3.1 LED5.1 R7.1 R22.1 R26.1 R31.1 R36.1 R37.1 R38.1 R42.1 R43.2 U1.1 U3.1 U4.19 U4.26 U4.38 U4.57 U5.5 | length 21.9
  Top Layer 1 w0.254: U3.1 58.665,106.544 v3(58.674,106.553) ; C22.1 C1.1 75.819,99.214 76.096,98.937 76.096,97.94 v3(75.957,97.801) ; v3(83.439,101.981) U1.1 85.787,101.952 LED1.1 ; v6(98.552,116.078) C5.1 98.852,114.253 100.561,112.544 100.561,112.387 C6.1
  Bottom Layer 4 w0.254: U4.57 79.625,85.213 v5(79.629,85.217) ; U4.38 84.054,81.641 v5(84.074,81.661) ; v5(84.34,87.642) 88.333,87.642 U4.19
+12V: C3.1 C4.1 D1.2 F1.2 J5.5 R4.2 R10.1 R12.1 U2.6
+12VPWR: F1.1 J6.3 J7.3
ADC0: J1.4 U4.16
ADC1: J1.6 U4.15
ADC2: J1.8 U4.14
ADC3: J1.10 U4.13
ADC4: J1.12 U4.12
ButD: C10.1 D4.3 R22.2 R23.2 U4.23
ButD_IN: J5.2 R23.1
ButN: C11.1 D6.3 R26.2 R27.2 U4.22
ButN_IN: J5.3 R27.1
ButR: C12.1 D9.3 R31.2 R32.2 U4.21
ButR_IN: J5.4 R32.1
CAN_BMS_RX: U3.3 U4.58
CAN_BMS_TX: R17.2 U3.2 U4.59
CAN_BMSS_H: J7.1 R13.2 R20.1 U3.7
CAN_BMSS_L: J7.2 R14.1 R19.1 U3.6
CAN_MUX_RX: U1.3 U4.61
CAN_MUX_TX: R5.2 U1.2 U4.60 | length 4
  Top Layer 1 w0.254: U1.2 86.408,103.251 88.107,101.552 R5.2
CAN_MUXED_H: J6.1 R1.2 R9.1 U1.7 | length 6.2
  Top Layer 1 w0.254: R9.1 79.248,100.114 78.931,100.431 78.931,100.457 78.704,100.684 78.509,100.684 78.486,100.707 R1.2 78.486,103.102 78.635,103.251 U1.7
CAN_MUXED_L: J6.2 R2.1 R8.1 U1.6 | length 5
  Top Layer 1 w0.254: R2.1 76.839,105.791 76.862,105.768 76.862,105.573 77.914,104.521 U1.6
ChrgLED: Q6.3 R45.1 U4.29
ChrgLED_OUT: J7.6 Q6.1
FluidHeater: Q7.3 R46.1 U4.30
FluidHeater_OUT: J6.6 Q7.1
GND: C1.2 C2.1 C3.2 C4.2 C5.2 C6.2 C7.1 C8.2 C9.1 C10.2 C11.2 C12.2 C13.2 C14.2 C15.2 C16.2 C17.2 C18.2 C19.2 C20.2 C21.2 C22.2 C23.1 C24.1 D2.1 D4.1 D6.1 D7.1 D9.1 D10.1 D11.1 D12.1 J1.14 J2.12 J2.14 J3.3 J4.1 J5.1 LED4.2 Q1.2 Q2.2 Q3.2 Q4.2 Q5.2 Q6.2 Q7.2 R1.1 R2.2 R6.2 R11.1 R13.1 R14.2 R15.2 R18.2 R24.2 R28.2 R34.2 R35.2 R45.2 R46.2 S1.1 U1.4 U2.4 U3.4 U4.9 U4.20 U4.25 U4.41 U4.56 U5.2 | length 51.7
  Top Layer 1 w0.254: R18.2 R14.2 56.515,102.702 U3.4 56.556,102.743 v1(58.674,102.743) ; Q1.2 59.752,116.934 v4(59.753,114.935) v4(59.753,114.935) v4@59.817,114.935 ; v4(61.976,122.174) C4.2 62.183,124.079 C3.2 64.708,123.76 LED4.2 ; v1(73.693,99.982) 73.725,100.014 C22.2 C1.2 75.834,100.03 77.709,100.03 C2.1 77.724,100.053 77.747,100.076 78.463,100.076 78.486,100.099 R1.1 ; R2.2 R6.2 78.59,105.791 78.613,105.814 v1(78.613,106.807) ; v1(83.566,105.283) 84.074,105.791 U1.4 ; v4(93.98,109.474) 93.98,111.711 94.052,111.784 94.283,111.553 C5.2 100.561,111.553 100.584,111.576 C6.2 100.6,111.648 101.839,111.648 R15.2
  Bottom Layer 4 w0.254: U4.56 77.208,84.709 v2(81.28,84.709) ; U4.41 82.554,82.165 v2(82.55,82.169) 85.094,84.713 U4.25 ; U4.9 83.054,88.142 v2(83.058,88.138) ; v2(85.618,87.142) 88.333,87.142 U4.20
GPIOC13: J2.3 U4.47
GPIOC14: J2.1 U4.48
GPIOD0: J2.5 U4.46
GPIOD1: J1.13 U4.49
GPIOD2: J1.11 U4.50
GPIOD3: J1.9 U4.51
GPIOD4: J1.7 U4.52
GPIOD5: J1.5 U4.53
GPIOD6: J1.3 U4.54
GPIOD7: J1.1 U4.55
GPIOD8: J2.13 U4.42
GPIOD9: J2.11 U4.43
GPIOD10: J2.9 U4.44
GPIOD11: J2.7 U4.45
GROUND: D1.1 J6.4 J7.4 Q1.1
ILUM: D7.3 J4.4 Q4.3 R34.1
IMP: C19.1 D10.3 R36.2 R39.2 U4.11
IMP_IN: J4.3 R39.1
IsFHerror: C21.1 D12.3 R38.2 R41.2 U4.32
IsFHerror_IN: J6.5 R41.1
IsHeating: C20.1 D11.3 R37.2 R40.2 U4.31
IsHeating_IN: J7.5 R40.1
LightD: Q2.3 R24.1 U4.24
LightD_OUT: D3.1 J5.6 Q2.1
LightN: Q3.3 R28.1 U4.27
LightN_OUT: D5.1 J5.7 Q3.1
LightR: Q5.3 R35.1 U4.28
LightR_OUT: D8.1 J5.8 Q5.1
MCLR: J3.1 R44.1 U4.7
NetC2_2: C2.2 R3.2 R8.2 R9.2 | length 3.1
  Top Layer 1 w0.254: C2.2 77.74,99.329 79.233,99.329 R9.2 R8.2 R3.2
NetC7_2: C7.2 U2.3
NetC9_2: C9.2 R16.2 R19.2 R20.2
NetC17_1: C17.1 U4.39 Y1.2
NetC18_1: C18.1 U4.40 Y1.1
NetC24_2: C24.2 D14.1 R43.1 S1.2 U5.3
NetD2_2: D2.2 L1.1 U2.2
NetD3_2: D3.2 R21.2
NetD5_2: D5.2 R25.2
NetD8_2: D8.2 R29.2
NetLED1_2: LED1.2 R5.1 | length 0.9
  Top Layer 1 w0.254: LED1.2 R5.1
NetLED2_2: LED2.2 R15.1
NetLED3_2: LED3.2 R17.1
NetLED4_1: LED4.1 R12.2 | length 0.9
  Top Layer 1 w0.254: LED4.1 R12.2
NetLED5_2: LED5.2 R30.1
NetQ1_3: Q1.3 R10.2
NetQ4_1: Q4.1 R21.1 R25.1 R29.1
NetR3_1: R3.1 U1.8 | length 2.2
  Top Layer 1 w0.254: R3.1 80.772,101.821 80.932,101.981 U1.8
NetR4_1: R4.1 U2.1 U2.7 U2.8
NetR6_1: R6.1 U1.5 | length 1.8
  Top Layer 1 w0.254: R6.1 U1.5
NetR7_2: R7.2 R11.2 U2.5
NetR16_1: R16.1 U3.8
NetR18_1: R18.1 U3.5
NetR30_2: R30.2 U4.37
NetR33_2: R33.2 U4.8
PGC: J3.5 U4.17
PGD: J3.4 U4.18
RESET: C23.2 D13.1 R42.2 R44.2 U5.1
RX: J2.10 U4.34
TX: J2.8 U4.33
WDI: R33.1 U5.4
pads on no net: U4.1 U4.2 U4.3 U4.4 U4.5 U4.6 U4.10 U4.35 U4.36 U4.62 U4.63 U4.64 U5.6

## Polygon pours and split planes (outlines as drawn)
GND on GND (split plane): 170.559,83.441 165.134,83.441 165.034,83.432 164.939,83.403 164.85,83.355 164.773,83.292 125.379,43.898 125.364,43.906 125.269,43.935 125.169,43.944 95.123,43.944 95.023,43.935 94.928,43.906 94.839,43.858 94.762,43.795 77.132,26.164 36.832,26.164 36.832,135.634 170.559,135.634
+5V on +5V (split plane): 170.559,83.441 165.134,83.441 165.034,83.432 164.939,83.403 164.85,83.355 164.773,83.292 125.379,43.898 125.364,43.906 125.269,43.935 125.169,43.944 95.123,43.944 95.023,43.935 94.928,43.906 94.839,43.858 94.762,43.795 77.132,26.164 36.832,26.164 36.832,135.634 170.559,135.634

## Text inside footprints (layer, text, board x,y; h text height)
J1: Top Overlay "13" at 38.862,80.518 h1.27 r270; Top Overlay "14" at 41.402,80.391 h1.27 r270; Top Overlay "1" at 38.862,100.711 h1.27 r270; Top Overlay "2" at 41.402,100.711 h1.27 r270
J2: Top Overlay "2" at 41.402,80.518 h1.27 r270; Top Overlay "1" at 38.862,80.518 h1.27 r270; Top Overlay "14" at 41.402,60.198 h1.27 r270; Top Overlay "13" at 38.862,60.198 h1.27 r270
J4: Top Overlay "3" at 42.418,46.101 h1.27 r90; Top Overlay "4" at 39.878,46.101 h1.27 r90; Top Overlay "2" at 39.878,39.497 h1.27 r90; Top Overlay "1" at 42.418,40.005 h1.27 r90
J5: Top Overlay "8" at 39.878,58.547 h1.27 r90; Top Overlay "7" at 42.418,58.547 h1.27 r90; Top Overlay "1" at 42.418,47.371 h1.27 r90; Top Overlay "2" at 39.878,46.863 h1.27 r90
J6: Top Overlay "1" at 42.418,100.838 h1.27 r90; Top Overlay "2" at 39.878,100.33 h1.27 r90; Top Overlay "5" at 42.418,109.474 h1.27 r90; Top Overlay "6" at 39.878,109.474 h1.27 r90
J7: Top Overlay "1" at 42.291,120.396 h1.27 r90; Top Overlay "2" at 39.751,120.904 h1.27 r90; Top Overlay "5" at 42.291,111.76 h1.27 r90; Top Overlay "6" at 39.751,111.76 h1.27 r90